# EAGLE board untitled (EAGLE 9.6.2)
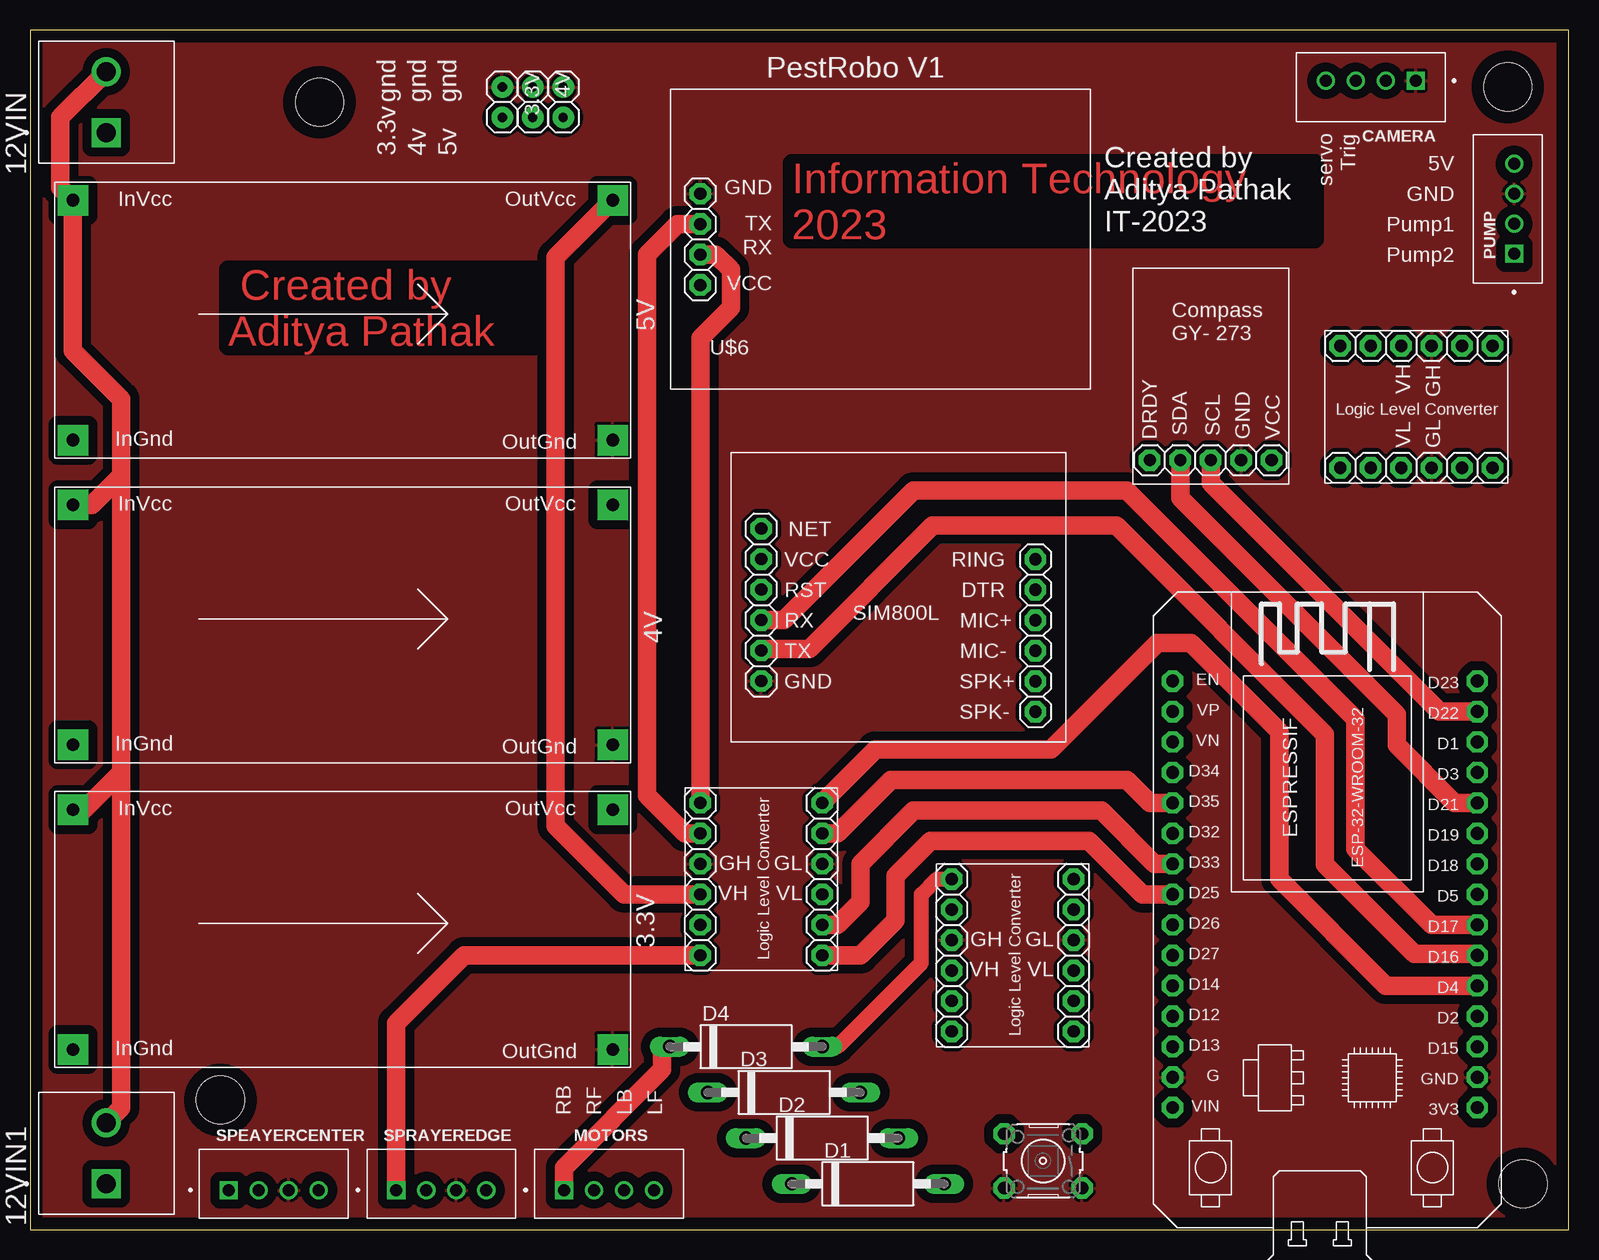
[diagram p0: board, top side]
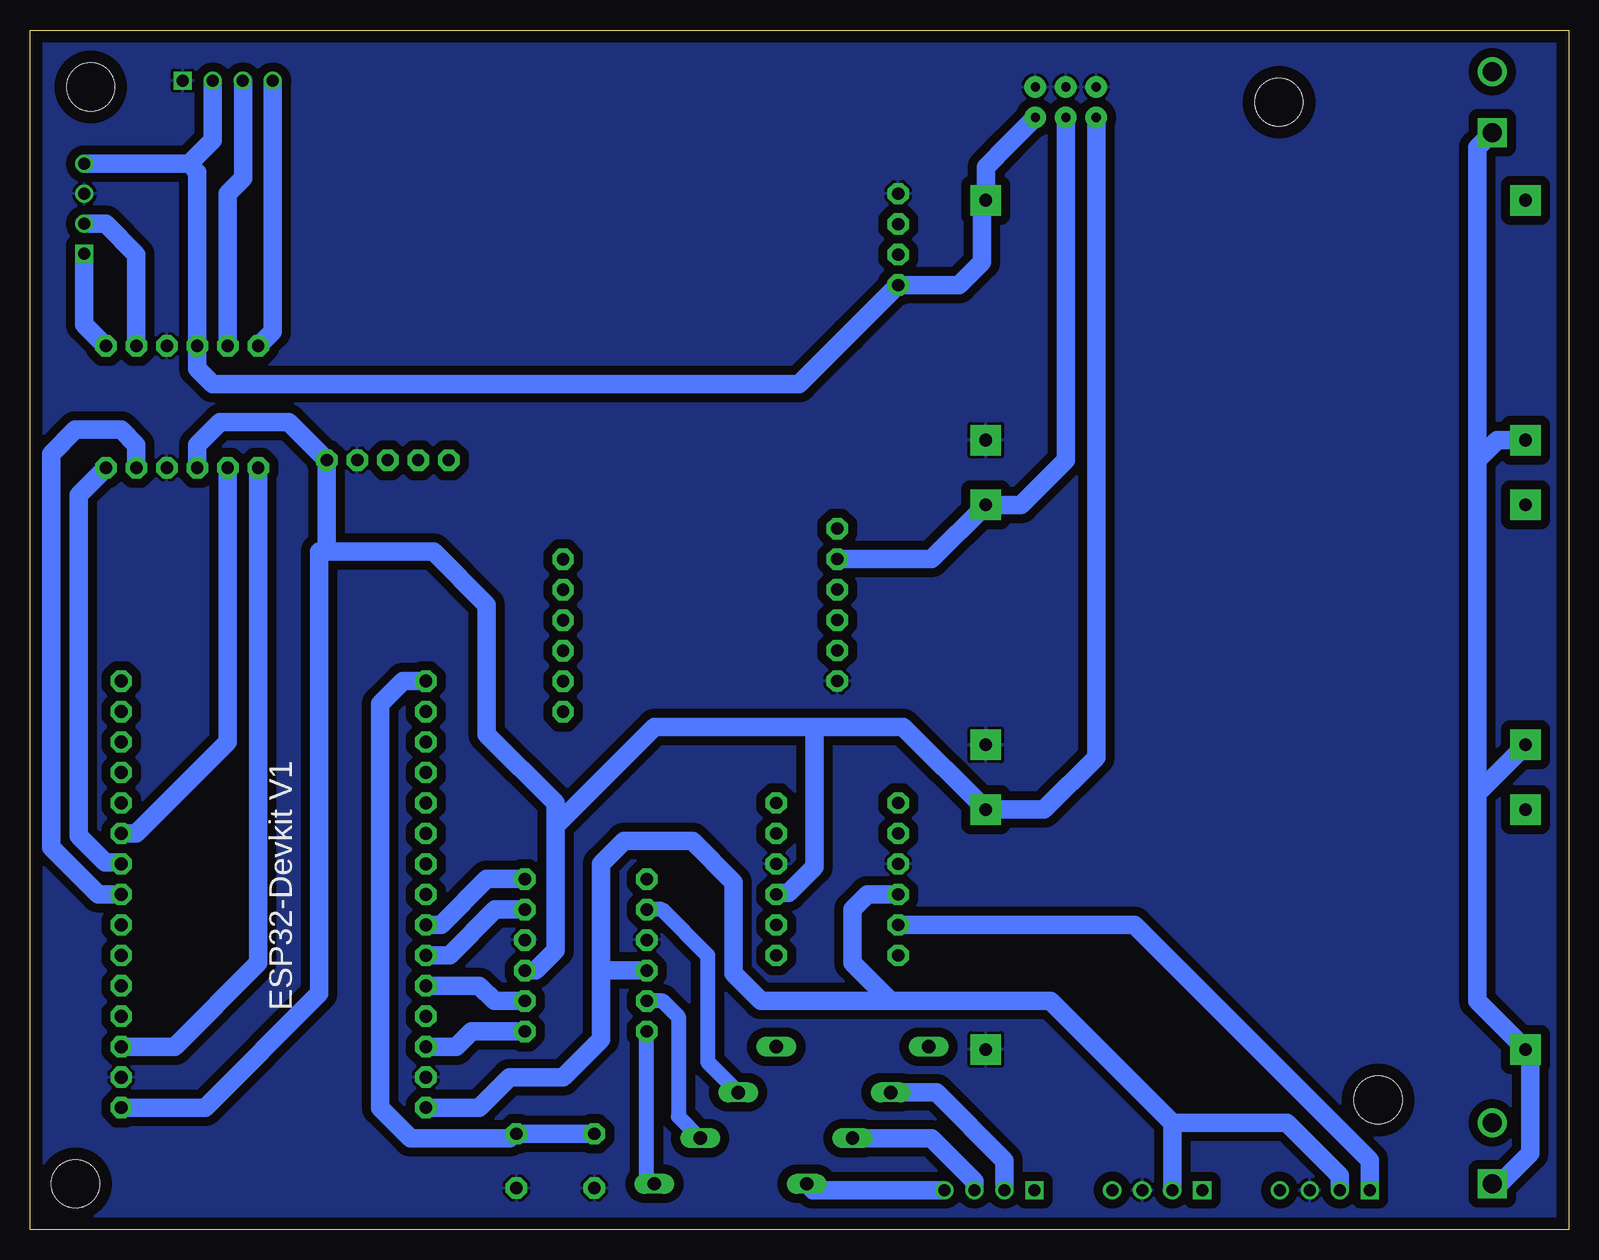
[diagram p1: board, bottom side, seen from below]

Size 128.25 x 100 mm. Coordinates in mm from the lower left corner, seen from the top.
Outline: 0,0 128.25,0 128.25,100 0,100 0,0
Copper layers (1*16): Top 0.035mm / dielectric 1.5mm / Bottom 0.035mm
Design rules "default *": minimum track width 40mil, minimum drill 0.35mm, track to track 20mil, track to pad 20mil, pad to pad 3mil, via to via 6mil, smd to smd 6mil, copper to edge 40mil, drill to drill 6mil, minimum pad ring 10mil, minimum via ring 8mil, stop-mask expansion 4mil, vias tented up to drill 0mil, thermal gap 10mil
Net classes: 0 default: width 1.27 mm, clearance 0.762 mm; 1 power: width 1.524 mm, clearance 0.762 mm
Holes 3.99 mm at 24.13,93.98 124.46,3.81 123.19,95.25 15.88,10.79

## Footprints (pad centres in the part's own frame; a part is rotated, then mirrored left to right if it is on the bottom)
1X02 = drill 0.762 pad 1.778: 1 -1.27,0; 2 1.27,0
2X2PAD = drill 1.06 pad 2.54 square: P$1 -1.5,-1.5; P$2 -1.5,18.5; P$3 43.5,-1.5; P$4 43.5,18.5
CUI_TB010-508-02BE = drill 1.6 square: 1 0,0 | drill 1.6: 2 5.08,0
ESP32-DEVKITV1 = drill 1.067 pad 1.778 octagon: 3V3 0,0; D1 30.48,0; D2 7.62,0; D3 27.94,0; D4 10.16,0; D5 17.78,0; D12 7.62,25.4; D13 5.08,25.4; D14 10.16,25.4; D15 5.08,0; D16 12.7,0; D17 15.24,0; D18 20.32,0; D19 22.86,0; D21 25.4,0; D22 33.02,0; D23 35.56,0; D25 17.78,25.4; D26 15.24,25.4; D27 12.7,25.4; D32 22.86,25.4; D33 20.32,25.4; D34 27.94,25.4; D35 25.4,25.4; EN 35.56,25.4; GND 2.54,25.4; GND@1 2.54,0; VIN 0,25.4; VN 30.48,25.4; VP 33.02,25.4
JST_B4B-XH-A(LF)(SN) = drill 1 square: 1 -3.75,-0.525 | drill 1: 2 -1.25,-0.525; 3 1.25,-0.525; 4 3.75,-0.525
DO15-12 = drill 1.118 long: A 6.35,0; C -6.35,0
B3F-10XX = drill 1.016 pad 1.778 octagon: 1 -3.251,2.261; 2 3.251,2.261; 3 -3.251,-2.261; 4 3.251,-2.261
1X05 = drill 1.016 pad 1.778 octagon: 1 -5.08,0; 2 -2.54,0; 3 0,0; 4 2.54,0; 5 5.08,0
1X06 = drill 1.016 pad 1.778 octagon: 1 -6.35,0; 2 -3.81,0; 3 -1.27,0; 4 1.27,0; 5 3.81,0; 6 6.35,0; 7 -6.35,-10.16; 8 -3.81,-10.16; 9 -1.27,-10.16; 10 1.27,-10.16; 11 3.81,-10.16; 12 6.35,-10.16
1X04 = drill 1.016 pad 1.778 octagon: 1 -3.81,0; 2 -1.27,0; 3 1.27,0; 4 3.81,0
6X2DIFF = drill 1.016 pad 1.778 octagon: 1 2.534,5.086; 2 2.534,7.626; 3 2.534,10.166; 4 2.534,12.706; 5 2.534,15.246; 6 2.534,17.786; 7 25.395,2.529; 8 25.395,5.069; 9 25.395,7.609; 10 25.395,10.149; 11 25.395,12.689; 12 25.395,15.229

## Placement (x,y rotation side)
3.3V  PINHD-1X2  [1X02]  39.37,93.98 270 top
3.6V  BUCKCONVERTER  [2X2PAD]  5.08,16.51 0 top
4V  PINHD-1X2  [1X02]  41.91,93.98 270 top
5V  PINHD-1X2  [1X02]  44.45,93.98 270 top
12VIN  TB010-508-02BE  [CUI_TB010-508-02BE]  6.35,91.44 90 top
12VIN1  TB010-508-02BE  [CUI_TB010-508-02BE]  6.35,3.81 90 top
BOARD1  ESP32DEVKITV1  [ESP32-DEVKITV1]  120.65,10.16 90 top
CAMERA  B4B-XH-A(LF)(SN)  [JST_B4B-XH-A(LF)(SN)]  111.76,95.25 180 top
D1  1N5060GP  [DO15-12]  69.85,3.81 0 top
D2  1N5060GP  [DO15-12]  66.04,7.62 0 top
D3  1N5060GP  [DO15-12]  62.87,11.43 0 top
D4  1N5060GP  [DO15-12]  59.69,15.24 0 top
MOTORS  B4B-XH-A(LF)(SN)  [JST_B4B-XH-A(LF)(SN)]  48.26,3.81 0 top
PUMP  B4B-XH-A(LF)(SN)  [JST_B4B-XH-A(LF)(SN)]  123.19,85.09 90 top
S1  [B3F-10XX]  84.45,5.71 180 top
SPEAYERCENTER  B4B-XH-A(LF)(SN)  [JST_B4B-XH-A(LF)(SN)]  20.32,3.81 0 top
SPRAYEREDGE  B4B-XH-A(LF)(SN)  [JST_B4B-XH-A(LF)(SN)]  34.29,3.81 0 top
U$1  BUCKCONVERTER  [2X2PAD]  5.08,41.91 0 top
U$2  GY273  [1X05]  98.42,64.14 180 top
U$3  LOGICLEVELSHIFTER  [1X06]  115.57,73.66 0 top
U$4  LOGICLEVELSHIFTER  [1X06]  76.83,22.86 90 top
U$5  LOGICLEVELSHIFTER  [1X06]  55.88,29.21 90 top
U$6  [1X04]  55.88,82.55 90 top
U$7  SIM800L  [6X2DIFF]  58.42,40.64 0 top
U$8  BUCKCONVERTER  [2X2PAD]  5.08,67.31 0 top

## Library data of the parts
3.3V 4V 5V = Connector; CATEGORY: CONNECTOR; SUB-CATEGORY: PIN-HEADER
3.6V U$1-U$8 = PestBot
12VIN 12VIN1 = TB010-508-02BE; AVAILABILITY: Good; CUI_PURCHASE_URL: https://www.cuidevices.com/product/interconnect/connectors/terminal-blocks/tb010-508-series?utm_source=snapeda.com&utm_medium=referral&utm_campaign=snapedaBOM; DESCRIPTION: 2~24 Poles, Screw Type, Horizontal, 5.08 Pitch, 26~12 (AWG), Terminal Block Connector; MF: CUI Devices; MP: TB010-508-02BE; PACKAGE: None; PRICE: None; PURCHASE-URL: https://pricing.snapeda.com/search/part/TB010-508-02BE/?ref=eda
BOARD1 = ESP32-DEVKITV1
CAMERA MOTORS PUMP SPEAYERCENTER SPRAYEREDGE = B4B-XH-A_LF__SN_; AVAILABILITY: In Stock; DESCRIPTION: HEADER, VERTICAL, 4WAY; Pitch Spacing: 2.5mm; No. of Contacts: 4Contacts; Gender: Header; Product Range: XH Series; Contact Termination Type: Through Hole; No. of Rows: 1Rows; Contact Plating: Tin Plated Contacts; Contact Material: Brass; SVHC: No SVHC (17-Dec-2015); Contact Resistance: 10mohm; Current Rating: 3A; Insulation Resistance: 1000Mohm; Operating Temperature Max: 85°C; Operating Temperature Min: -25°C; Voltage Rating VAC: 250V; Wire Size AWG Max: 22AWG; Wire Size AWG Min: 30AWG; Withstand Voltage: 1000V; MF: JST; MP: B4B-XH-A (LF)(SN); PACKAGE: None; PRICE: None; PURCHASE-URL: https://pricing.snapeda.com/search/part/B4B-XH-A (LF)(SN)/?ref=eda
D1-D4 = diode
S1 = switch-omron; MPN: B3F-1000; OC_FARNELL: 176432; OC_NEWARK: 36M3542

## Nets
3.3V [power]: 3.3V.2 3.6V.P$4 BOARD1.3V3 U$2.1 U$3.9 U$4.9 U$5.9
4V [power]: 4V.2 U$1.P$4 U$7.5
5V [power]: 5V.2 BOARD1.VIN CAMERA.2 PUMP.4 SPEAYERCENTER.2 SPRAYEREDGE.2 U$3.3 U$4.3 U$5.3 U$6.1 U$8.P$4
12V+ [power]: 3.6V.P$2 12VIN1.2 12VIN.2 U$1.P$2 U$8.P$2
12VGND [power]: 3.6V.P$1 12VIN1.1 12VIN.1 U$1.P$1 U$8.P$1
CAMTRIGHV: CAMERA.3 U$3.2
CAMTRIGLV: BOARD1.D19 U$3.8
EN: BOARD1.EN S1.3 S1.4
GND [power]: 3.3V.1 3.6V.P$3 4V.1 5V.1 BOARD1.GND BOARD1.GND@1 CAMERA.1 PUMP.3 S1.1 S1.2 SPEAYERCENTER.3 SPRAYEREDGE.3 U$1.P$3 U$2.2 U$3.4 U$3.10 U$4.4 U$4.10 U$5.4 U$5.10 U$6.4 U$7.1 U$8.P$3
GPSRXHV: U$5.5 U$6.3
GPSRXLV: BOARD1.D35 U$5.11
GPSTXHV: U$5.6 U$6.2
GPSTXLV: BOARD1.D4 U$5.12
GSMRXLV: BOARD1.D16 U$7.2
GSMTXLV: BOARD1.D17 U$7.3
MBCHV: SPEAYERCENTER.1 U$5.2
MBCLV: BOARD1.D33 U$5.8
MBEHV: SPRAYEREDGE.1 U$5.1
MBELV: BOARD1.D25 U$5.7
MOTORLBHV: D2.C MOTORS.3
MOTORLBLV: BOARD1.D14 U$4.8
MOTORLFHV: D1.C MOTORS.4
MOTORLFLV: BOARD1.D13 U$4.7
MOTORRBHV: D4.C MOTORS.1
MOTORRBLV: BOARD1.D26 U$4.12
MOTORRFHV: D3.C MOTORS.2
MOTORRFLV: BOARD1.D27 U$4.11
N$17: D1.A U$4.1
N$18: D2.A U$4.2
N$38: D3.A U$4.5
N$39: D4.A U$4.6
PUMP1HV: PUMP.2 U$3.5
PUMP1LV: BOARD1.D5 U$3.11
PUMP2HV: PUMP.1 U$3.6
PUMP2LV: BOARD1.D18 U$3.12
SCL: BOARD1.D22 U$2.3
SDA: BOARD1.D21 U$2.4
SERVOPINCAMHV: CAMERA.4 U$3.1
SERVOPINCAMLV: BOARD1.D15 U$3.7

## Tracks (layer width: path | path; a pad name or v marks a point on that pad's centre or on a via)
3.3V
  Bottom 1.524: U$3.9 114.3,65.41 112.39,67.31 106.68,67.31 U$2.1 103.5,56.52 | BOARD1.3V3 113.67,10.16 104.14,19.68 104.14,56.52 103.5,56.52 | U$4.9 86.12,21.59 84.45,23.26 84.45,33.66 | 103.5,56.52 94.61,56.52 90.17,52.07 90.17,41.27 84.45,35.56 84.45,33.66 | 3.3V.2 39.37,39.37 43.73,35.01 3.6V.P$4 55.48,41.91 62.87,41.91 | 84.45,33.66 76.2,41.91 62.87,41.91 | U$5.9 65.91,28.07 65.04,28.07 62.87,30.24 62.87,41.91
4V
  Bottom 1.524: 4V.2 41.91,64.14 45.63,60.41 U$1.P$4 53.1,55.89 U$7.5
5V
  Top 1.524: U$5.3 49.53,27.94 43.81,33.66 43.81,81.05 U$8.P$4
  Bottom 1.524: PUMP.4 115,88.84 | CAMERA.2 113.01,90.83 115,88.84 | 115,88.84 114.3,88.14 U$3.3 114.3,71.75 113.03,70.48 64.14,70.48 60.01,74.61 U$6.1 50.8,78.74 48.9,80.64 48.9,85.5 U$8.P$4 48.58,88.58 46.67,90.49 5V.2 | BOARD1.VIN 90.81,10.16 88.27,12.7 83.82,12.7 80.64,15.88 80.64,21.59 | SPRAYEREDGE.2 33.04,8.89 | 33.04,8.89 33.04,8.91 43.18,19.05 56.52,19.05 | 56.52,19.05 59.69,22.23 59.69,26.67 58.42,27.94 U$5.3 | SPEAYERCENTER.2 19.07,4.46 23.5,8.89 33.04,8.89 | 80.64,21.59 80.64,30.48 78.74,32.38 73.03,32.38 69.6,28.96 69.6,21.34 67.31,19.05 56.52,19.05 | U$4.3 80.64,21.59
12V+
  Top 1.524: 12VIN.2 2.54,92.71 2.54,86.85 U$8.P$2 3.58,73.25 7.62,69.22 7.62,62.87 | 7.62,62.87 5.17,60.41 U$1.P$2 | 7.62,62.87 7.62,38.1 | 3.6V.P$2 4.53,35.01 7.62,38.1 | 7.62,38.1 7.62,10.16 12VIN1.2
12VGND
  Bottom 1.524: 12VIN1.1 5.71,3.81 3.17,6.35 3.17,14.61 3.6V.P$1 7.62,19.05 7.62,36.37 | U$1.P$1 7.62,36.37 | 7.62,36.37 7.62,64.14 | U$8.P$1 5.95,65.81 7.62,64.14 | 7.62,64.14 7.62,90.17 12VIN.1
CAMTRIGHV
  Bottom 1.524: U$3.2 111.76,86.36 110.49,87.63 110.49,95.75 CAMERA.3
CAMTRIGLV
  Bottom 1.524: U$3.8 111.76,40.64 119.38,33.02 BOARD1.D19
EN
  Bottom 1.524: S1.4 S1.3 87.91,7.98 88.27,7.62 96.52,7.62 99.06,10.16 99.06,43.81 97.16,45.72 BOARD1.EN
GND
  pour Top: 0,100.33 0,0 128.27,0 128.27,100.33
  pour Bottom: 0,100.33 0,0 128.27,0 128.27,100.33
GPSRXHV
  Top 1.524: U$6.3 53.98,83.82 51.44,81.28 51.44,36.2 54.61,33.02 U$5.5
GPSRXLV
  Top 1.524: U$5.11 67.31,33.02 71.75,37.47 91.44,37.47 93.34,35.56 BOARD1.D35
GPSTXHV
  Top 1.524: U$6.2 57.15,81.28 58.42,80.01 58.42,76.83 55.88,74.3 U$5.6
GPSTXLV
  Top 1.524: BOARD1.D4 113.03,20.32 104.14,29.21 104.14,41.51 96.76,48.9 93.98,48.9 85.09,40.01 70.48,40.01 U$5.12
GSMRXLV
  Top 1.524: BOARD1.D16 120.52,22.99 115.39,22.99 107.95,30.42 107.95,41.27 90.55,58.67 75.24,58.67 64.96,48.39 61.08,48.39 U$7.2
GSMTXLV
  Top 1.524: U$7.3 62.87,50.81 73.66,61.59 91.44,61.59 110.49,42.55 110.49,31.75 116.84,25.4 BOARD1.D17
MBCHV
  Bottom 1.524: SPEAYERCENTER.1 16.57,5.78 36.2,25.4 U$5.2
MBCLV
  Top 1.524: U$5.8 67.31,25.4 69.22,27.3 69.22,30.48 73.66,34.92 89.3,34.92 93.74,30.48 BOARD1.D33
MBEHV
  Top 1.524: U$5.1 36.2,22.86 30.54,17.2 SPRAYEREDGE.1
MBELV
  Top 1.524: U$5.7 69.22,22.86 72.14,25.78 72.14,29.47 75.05,32.38 88.27,32.38 92.71,27.94 BOARD1.D25
MOTORLBHV
  Bottom 1.524: MOTORS.3 49.51,4.02 53.11,7.62 D2.C
MOTORLBLV
  Bottom 1.524: BOARD1.D14 90.81,20.32 89.53,19.05 U$4.8
MOTORLFHV
  Bottom 1.524: MOTORS.4 62.98,3.29 D1.C
MOTORLFLV
  Bottom 1.524: U$4.7 91.44,16.51 92.71,15.24 BOARD1.D13
MOTORRBHV
  Top 1.524: D4.C 52.7,14.61 52.7,13.97 52.7,13.34 44.51,5.14 MOTORS.1
MOTORRBLV
  Bottom 1.524: U$4.12 90.17,29.21 93.98,25.4 BOARD1.D26
MOTORRFHV
  Bottom 1.524: D3.C 52.7,11.43 47.01,5.74 MOTORS.2
MOTORRFLV
  Bottom 1.524: U$4.11 89.48,26.67 93.29,22.86 BOARD1.D27
N$17
  Bottom 1.27: U$4.1 76.83,4.45 D1.A
N$18
  Bottom 1.27: D2.A 74.19,9.42 74.19,17.74 75.51,19.05 U$4.2
N$38
  Bottom 1.27: D3.A 71.75,13.97 71.75,22.86 75.56,26.67 U$4.5
N$39
  Top 1.27: D4.A 67.31,15.24 74.3,22.23 74.3,27.94 75.56,29.21 U$4.6
PUMP1HV
  Bottom 1.524: U$3.5 119.38,81.28 121.94,83.84 PUMP.2
PUMP1LV
  Bottom 1.524: U$3.11 119.38,65.41 120.65,66.67 124.46,66.67 126.47,64.66 126.47,31.86 122.56,27.94 BOARD1.D5
PUMP2HV
  Bottom 1.524: U$3.6 123.72,75.45 PUMP.1
PUMP2LV
  Bottom 1.524: BOARD1.D18 120.78,30.61 121.99,30.61 124.19,32.8 124.19,61.23 U$3.12
SCL
  Top 1.524: U$2.3 98.42,62.23 117.47,43.18 BOARD1.D22
SDA
  Top 1.524: U$2.4 95.89,60.96 113.92,42.93 113.92,40.39 118.75,35.56 BOARD1.D21
SERVOPINCAMHV
  Bottom 1.524: CAMERA.4 108.01,74.87 U$3.1
SERVOPINCAMLV
  Bottom 1.524: U$3.7 109.22,22.23 116.2,15.24 BOARD1.D15

## Text on the board
Top: Information Technology / 2023 | Created by / Aditya Pathak
tNames: PestRobo V1 | gnd | gnd | gnd | 3.3v | 4v | 5v | 5V | Trig | servo | GND | Pump1 | Created by / Aditya Pathak / IT-2023 | Pump2 | 5V | 4V | 3.3V | RB | RF | LB | LF